# Altium PCB 主板-加霍尔.PcbDoc (part 2 of 4)
Units mm, origin at the board's own origin, x right, y up, seen from the top; angles counter-clockwise.
Board outline 97.69 x 103.45 mm, 2 copper layers (Top Layer, Bottom Layer); 80 components, 81 nets, 260 pads, 281 vias.
Unrouted connection lines stored in the file: 12.
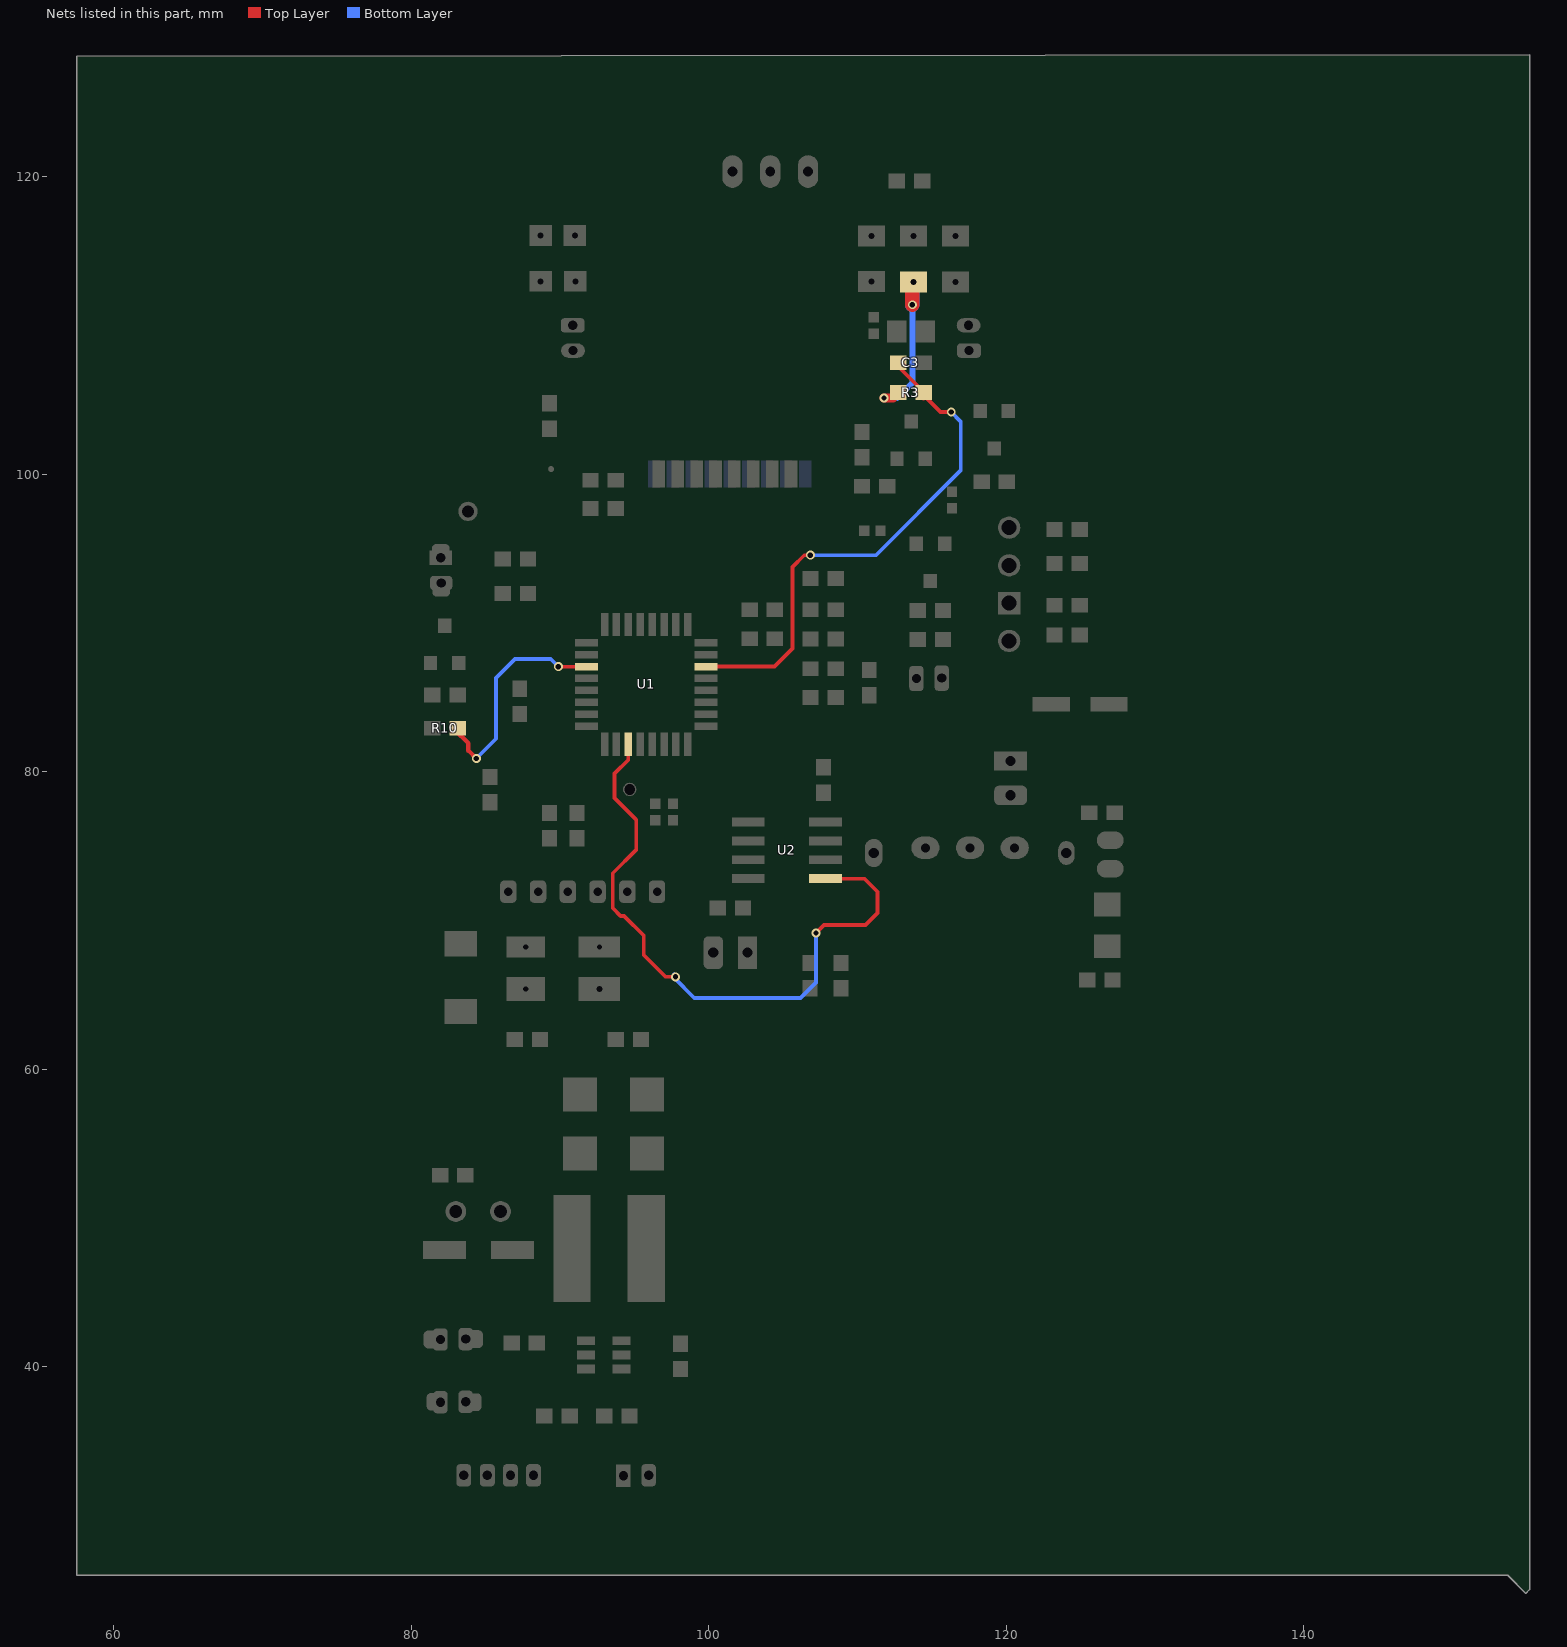
[diagram p2: the nets of this part, all layers, seen from the top]

## Via types
v1: diameter 0.6, hole 0.35, Top Layer to Bottom Layer, 105 vias
v2: diameter 0.7, hole 0.4, Top Layer to Bottom Layer, 104 vias
v3: diameter 0.8, hole 0.5, Top Layer to Bottom Layer, tented both sides, 30 vias
v4: diameter 0.8, hole 0.5, Top Layer to Bottom Layer, 15 vias
v5: diameter 1, hole 0.6, Top Layer to Bottom Layer, tented both sides, 5 vias
v6: diameter 1, hole 0.75, Top Layer to Bottom Layer, tented both sides, 5 vias
v7: diameter 3.4, hole 2.9, Top Layer to Bottom Layer, 4 vias
v8: diameter 0.65, hole 0.4, Top Layer to Bottom Layer, tented both sides, 2 vias
v9: diameter 0.8, hole 0.35, Top Layer to Bottom Layer, 2 vias
v10: diameter 0.7, hole 0.35, Top Layer to Bottom Layer, 2 vias
v11: diameter 1.1, hole 0.68, Top Layer to Bottom Layer, 2 vias
v12: diameter 0.62, hole 0.4, Top Layer to Bottom Layer, 1 vias
v13: diameter 0.95, hole 0.5, Top Layer to Bottom Layer, 1 vias
v14: diameter 0.9, hole 0.5, Top Layer to Bottom Layer, tented both sides, 1 vias
v15: diameter 0.7, hole 0.4, Top Layer to Bottom Layer, tented bottom, 1 vias
v16: diameter 0.8, hole 0.5, Top Layer to Bottom Layer, tented bottom, 1 vias

## Nets (pads, with @x,y where several pads share a name; then routed paths per layer and width w, separated by ;. In a path a pad name is that pad's centre, name@x,y a point inside that pad or via, vN(x,y) a via of type N, cw(c..) or ccw(c..) an arc to the next point about the centre after c; other vN are vias at no path point) (continued)
FI-R: U1.27 U2.1 | length 43.3
  Top Layer w0.254: U1.27@94.6,81.853 94.6,80.808 93.675,79.883 93.675,78.232 95.123,76.784 95.123,74.752 93.548,73.177 93.548,70.841 94.082,70.307 94.317,70.307 95.631,68.994 95.631,67.691 97.104,66.218 v1(97.765,66.218) ; v1(107.213,69.164) 107.747,69.698 110.541,69.698 111.354,70.51 111.354,71.933 110.469,72.817 U2.1@108.154,72.817
  Bottom Layer w0.254: v1@97.663,66.37 97.663,66.167 99.031,64.799 106.176,64.799 107.213,65.837 v1(107.213,69.164)
FL: pad.0@113.78,112.932 R3.2 | length 12.1
  Top Layer w0.254: pad.0@113.65,112.822 113.538,112.822 113.538,112.932 pad.0@113.75,112.932
  Top Layer w0.6: v1(111.785,105.131) 112.381,105.131 R3.2@112.75,105.5 ; pad.0@113.65,112.822 pad.0@113.69,112.862
  Top Layer w1: v1(113.69,111.404) pad.0@113.69,112.862
  Bottom Layer w0.4: v1(111.785,105.131) 112.674,105.131 113.69,106.147 v1(113.69,111.404)
  Bottom Layer w1: v1(113.69,111.404) pad.0@113.69,112.862
FL-U: C3.2 R3.1 U1.6 | length 35.1
  Top Layer w0.254: U1.6@99.825,87.077 104.426,87.077 105.639,88.29 105.639,93.777 106.426,94.564 v1(106.832,94.564) ; C3.2@112.984,107.315 112.674,107.315 R3.1@114.47,105.52 ; R3.1@114.45,105.105 R3.1@114.45,105.209 ; R3.1@114.579,105.207 115.595,104.191 v1(116.307,104.191)
  Bottom Layer w0.254: v1(106.832,94.564) 111.252,94.564 116.942,100.254 116.942,103.556 v1(116.307,104.191)
FM: R10.2 U1.19 | length 15.2
  Top Layer w0.254: v1(89.891,87.071) 91.769,87.071 U1.19@91.775,87.077
  Top Layer w0.3: R10.2@82.968,82.792 83.845,81.915 83.845,81.432 v1(84.379,80.899)
  Bottom Layer w0.254: v1(84.379,80.899) 85.7,82.22 85.7,86.309 86.97,87.579 89.383,87.579 v1(89.891,87.071)